# EAGLE board Notification area (EAGLE 7.3.0)
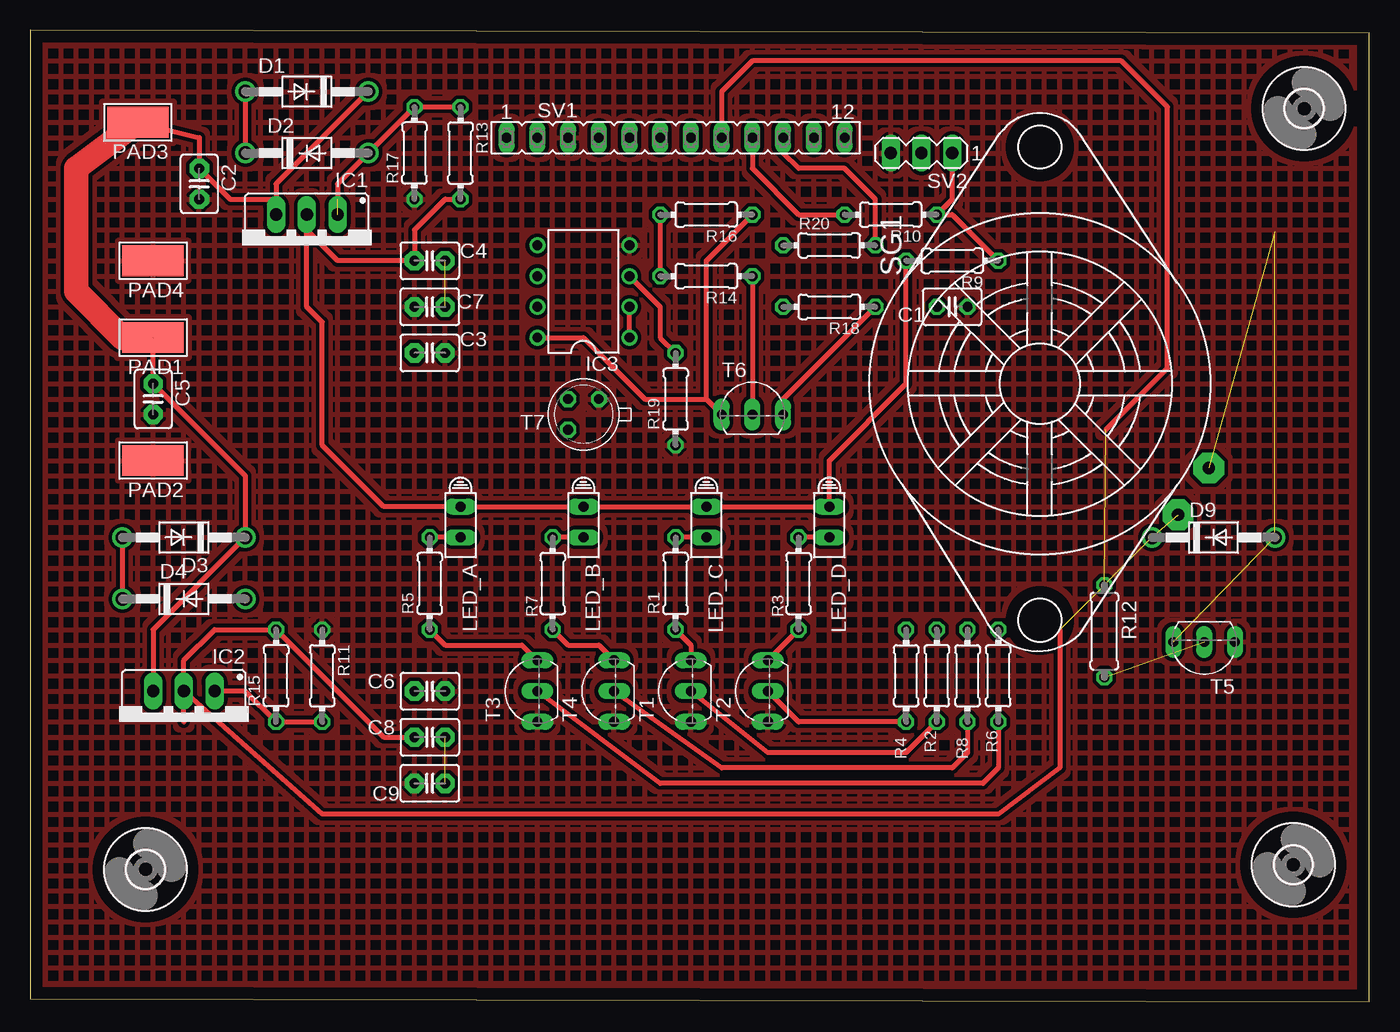
[diagram p0: board, top side]
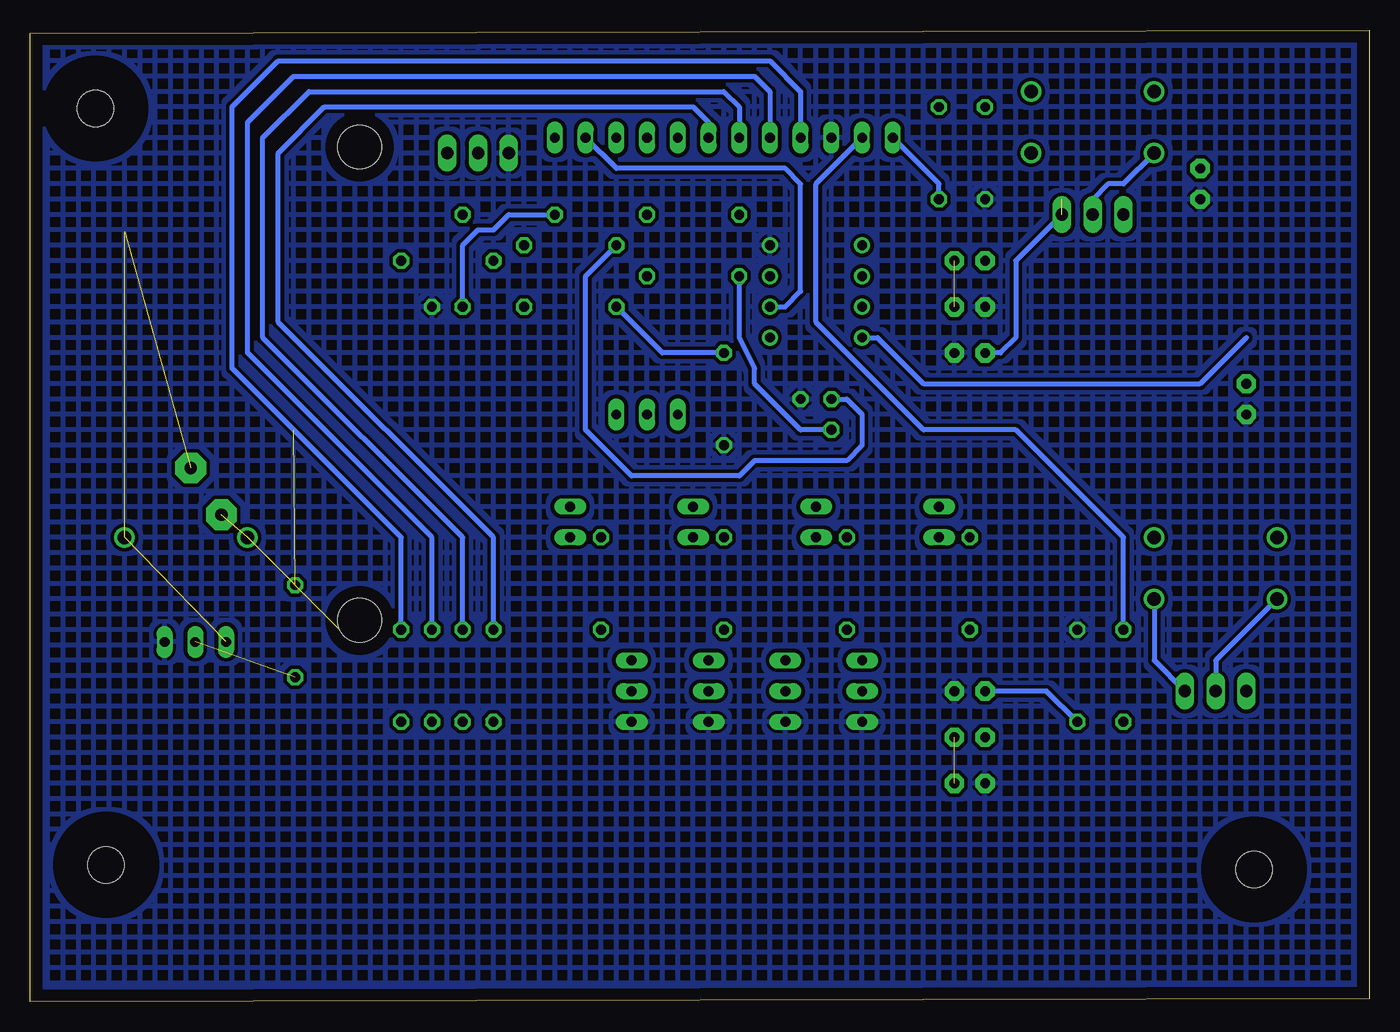
[diagram p1: board, bottom side, seen from below]

Size 110.67 x 80.25 mm. Coordinates in mm from the lower left corner, seen from the top.
Outline: 0,0.25 110.67,0 110.67,80 0,80.25 0,0.25
Copper layers (1*16): Top 0.035mm / dielectric 1.5mm / Bottom 0.035mm
Design rules "default": minimum track width 10mil, minimum drill 24mil, track to track 8mil, track to pad 8mil, pad to pad 8mil, via to via 8mil, smd to smd 8mil, copper to edge 40mil, drill to drill 8mil, minimum pad ring 10mil, minimum via ring 8mil, stop-mask expansion 4mil, vias tented up to drill 0mil, thermal gap 10mil

## Footprints (pad centres in the part's own frame; a part is rotated, then mirrored left to right if it is on the bottom)
C025-030X050 = drill 0.813 octagon: 1 -1.27,0; 2 1.27,0
C2.5-3 = drill 0.813 pad 1.6 octagon: 1 -1.27,0; 2 1.27,0
DO41-10 = drill 1.118: A 5.08,0; C -5.08,0
317TS = drill 1.016 long: 1 -2.54,-2.54; 2 0,-2.54; 3 2.54,-2.54
DIL08 = drill 0.813 pad 1.27: 1 -3.81,-3.81; 2 -1.27,-3.81; 3 1.27,-3.81; 4 3.81,-3.81; 5 3.81,3.81; 6 1.27,3.81; 7 -1.27,3.81; 8 -3.81,3.81
HLMP6 = drill 0.813 long: A -1.27,0; K 1.27,0
5-2,5 = smd 2.54 x 5.08: 1 0,0
0204/7 = drill 0.813 octagon: 1 -3.81,0; 2 3.81,0
0207/7 = drill 0.813 octagon: 1 -3.81,0; 2 3.81,0
F/DB18 = drill 1.016 pad 2.54 octagon: + -6.96,-13.97; - -10.82,-11.43 | hole 3.607: 19.558,0; -19.558,0
FE12 = drill 0.813 long: 1 -13.97,0; 2 -11.43,0; 3 -8.89,0; 4 -6.35,0; 5 -3.81,0; 6 -1.27,0; 7 1.27,0; 8 3.81,0; 9 6.35,0; 10 8.89,0; 11 11.43,0; 12 13.97,0
MA03-1 = drill 1.016 long: 1 -2.54,0; 2 0,0; 3 2.54,0
TO92-EBC = drill 0.813 long: B 0,-1.27; C 2.54,-1.27; E -2.54,-1.27
TO18 = drill 0.813 octagon: 1 -1.27,-1.27; 2 1.27,-1.27; 3 1.27,1.27
3,0 = hole 3: 0,0

## Placement (x,y rotation side)
C1  0.47uF  [C025-030X050]  76.2,57.4 0 top
C2  0.1uF  [C2.5-3]  13.97,67.56 270 top
C3  0.1uF  [C2.5-3]  33.02,53.59 0 top
C4  2uF  [C2.5-3]  33.02,61.21 0 top
C5  0.1uF  [C2.5-3]  10.16,49.78 270 top
C6  0.1uF  [C2.5-3]  33.02,25.65 0 top
C7  2uF  [C2.5-3]  33.02,57.4 180 top
C8  2uF  [C2.5-3]  33.02,21.84 0 top
C9  2uF  [C2.5-3]  33.02,18.03 180 top
D1  1N4001  [DO41-10]  22.86,75.18 180 top
D2  1N4001  [DO41-10]  22.86,70.1 0 top
D3  1N4004  [DO41-10]  12.7,38.35 180 top
D4  1N4004  [DO41-10]  12.7,33.27 0 top
D9  1N4004  [DO41-10]  97.79,38.35 0 top
IC1  [317TS]  22.86,62.48 180 top
IC2  [317TS]  12.7,23.11 180 top
IC3  LM358N  [DIL08]  45.72,58.67 90 top
LED_A  BLUE  [HLMP6]  35.56,39.62 270 top
LED_B  GREEN  [HLMP6]  45.72,39.62 270 top
LED_C  RED  [HLMP6]  55.88,39.62 270 top
LED_D  GREEN  [HLMP6]  66.04,39.62 270 top
PAD1  Motor +  [5-2,5]  10.16,54.86 90 top
PAD2  Motor -  [5-2,5]  10.16,44.7 90 top
PAD3  Power +  [5-2,5]  8.89,72.64 90 top
PAD4  Power -  [5-2,5]  10.16,61.21 90 top
R1  72  [0204/7]  53.34,34.54 90 top
R2  1.2K  [0204/7]  74.93,26.92 90 top
R3  72  [0204/7]  63.5,34.54 270 top
R4  1.2K  [0204/7]  72.39,26.92 270 top
R5  72  [0204/7]  33.02,34.54 90 top
R6  1.2K  [0204/7]  80.01,26.92 90 top
R7  72  [0204/7]  43.18,34.54 270 top
R8  1.2K  [0204/7]  77.47,26.92 270 top
R9  3.7K  [0204/7]  76.2,61.21 180 top
R10  2.3K  [0204/7]  71.12,65.02 180 top
R11  614  [0204/7]  24.13,26.92 270 top
R12  1K  [0207/7]  88.77,30.61 270 top
R13  200  [0204/7]  35.56,70.1 270 top
R14  50K  [0204/7]  55.88,59.94 180 top
R15  200  [0204/7]  20.32,26.92 90 top
R16  220  [0204/7]  55.88,65.02 180 top
R17  290  [0204/7]  31.75,70.1 90 top
R18  4.7K  [0204/7]  66.04,57.4 180 top
R19  2.41K  [0204/7]  53.34,49.78 90 top
R20  2.41K  [0204/7]  66.04,62.48 0 top
SG1  F/DB18  [F/DB18]  83.44,51.05 90 top
SV1  [FE12]  53.34,71.37 0 top
SV2  [MA03-1]  73.66,70.1 180 top
T1  [TO92-EBC]  53.34,25.65 90 top
T2  [TO92-EBC]  59.69,25.65 90 top
T3  [TO92-EBC]  40.64,25.65 90 top
T4  [TO92-EBC]  46.99,25.65 90 top
T5  [TO92-EBC]  97.03,28.45 180 top
T6  [TO92-EBC]  59.69,49.78 0 top
T7  2N2222  [TO18]  45.72,48.51 180 top
U$1  [3,0]  9.53,10.92 0 top
U$2  [3,0]  105.28,73.79 0 top
U$4  [3,0]  104.39,11.3 0 top

## Library data of the parts
C1 R1-R20 = rcl
C2-C9 = capacitor-wima
D1-D4 D9 = diode
IC1 IC2 = v-reg
IC3 = linear
LED_A LED_B LED_C LED_D = display-hp; MF: AGILENT TECHNOLOGIES; MPN: HLMP-6500; OC_FARNELL: 1652490; OC_NEWARK: 40K0088
PAD1-PAD4 = wirepad
SG1 = buzzer; OC_FARNELL: unknown; OC_NEWARK: unknown
SV1 = con-lsta; OC_FARNELL: unknown; OC_NEWARK: unknown
SV2 = con-lstb; OC_FARNELL: unknown; OC_NEWARK: unknown
T1-T7 = transistor-neu-to92
U$1 U$2 U$4 = holes

## Nets
+3V3: C4.1 D1.A D2.C IC1.2 LED_A.A LED_B.A LED_C.A LED_D.A R9.2 R13.2 SV1.1
+5V: C8.1 D3.A D4.C D9.C IC2.2 R15.2 SG1.- SV1.2
GND: C1.2 C2.2 C3.2 C5.2 C6.2 C7.2 C9.2 IC3.4 PAD2.1 PAD4.1 R11.1 R17.1 R19.1 SV1.3 SV2.3 T1.E T2.E T3.E T4.E T5.E T7.1
N$1: LED_C.K R1.2
N$2: R2.1 T1.B
N$3: LED_D.K R3.1
N$4: R4.2 T2.B
N$5: LED_A.K R5.2
N$6: R6.1 T3.B
N$7: LED_B.K R7.1
N$8: R8.2 T4.B
N$9: R6.2 SV1.4
N$10: C1.1 R10.2 SV1.9
N$11: R8.1 SV1.5
N$12: R4.1 SV1.7
N$13: R9.1 R10.1 SV2.1
N$14: R5.1 T3.C
N$16: R12.2 T5.B
N$17: C4.2 C7.1
N$18: R2.2 SV1.6
N$19: C3.1 D2.A IC1.1 R13.1 R17.2
N$20: C6.1 D4.A IC2.1 R11.2 R15.1
N$21: D9.A SG1.+ T5.C
N$22: R14.1 T6.B
N$23: R14.2 R16.2 T7.3
N$24: R12.1 SV1.8
N$25: R18.1 T6.C
N$26: IC3.1 IC3.2 SV1.11
N$27: IC3.3 R18.2 R19.2
N$28: R20.2 SV1.10
N$29: R20.1 T7.2
N$30: C8.2 C9.1
N$31: R7.2 T4.C
N$32: R1.1 T1.C
N$33: R3.2 T2.C
V+: C2.1 C5.1 D1.C D3.C IC1.3 IC2.3 IC3.8 PAD1.1 PAD3.1 R16.1 T6.E

## Tracks (layer width: path | path; a pad name or v marks a point on that pad's centre or on a via)
+3V3
  Top 0.406: D1.A D2.C | R13.2 34.29,66.29 31.75,63.75 C4.1 25.4,61.21 22.86,63.75 | 22.86,63.75 22.86,57.4 24.13,56.13 24.13,45.97 29.21,40.89 LED_A.A LED_B.A LED_C.A LED_D.A 66.04,44.7 72.39,51.05 R9.2 | 22.86,63.75 IC1.2
  Bottom 0.406: D2.C 20.32,67.56 21.59,67.56 22.86,66.29 IC1.2 | R13.2 35.56,67.56 SV1.1
+5V  (2 unrouted)
  Top 0.406: D3.A D4.C | IC2.2 12.7,28.19 15.24,30.73 R15.2 29.21,21.84 C8.1 | 12.7,23.11 IC2.2 | 85.09,30.73 85.09,19.3 80.01,15.49 24.13,15.49 IC2.2
  Bottom 0.406: D4.C 12.7,28.19 IC2.2 | R15.2 20.32,38.35 29.21,47.24 36.83,47.24 45.72,56.13 45.72,67.56 SV1.2
GND
  pour Bottom (isolate 0.305, hatched): 0,80.26 0,0.25 110.93,0.13 110.93,80.14
  pour Top (isolate 0.305, hatched): 0,80.26 0,0.25 110.93,0.64 110.93,80.65
N$1
  Top 0.406: LED_C.K R1.2
N$2
  Top 0.406: R2.1 72.39,20.57 60.96,20.57 T1.B
N$3
  Top 0.406: LED_D.K R3.1
N$4
  Top 0.406: R4.2 63.5,23.11 T2.B
N$5
  Top 0.406: LED_A.K R5.2
N$6
  Top 0.406: R6.1 80.01,19.3 78.74,18.03 52.07,18.03 T3.B
N$7
  Top 0.406: LED_B.K R7.1
N$8
  Top 0.406: R8.2 77.47,20.57 76.2,19.3 57.15,19.3 T4.B
N$9
  Bottom 0.406: R6.2 80.01,38.35 93.98,52.32 93.98,73.91 90.17,77.72 49.53,77.72 46.99,75.18 SV1.4
N$10
  Top 0.406: SV1.9 59.69,68.83 63.5,65.02 R10.2
  Bottom 0.406: C1.1 74.93,62.48 73.66,63.75 72.39,63.75 71.12,65.02 R10.2
N$11
  Bottom 0.406: R8.1 77.47,38.35 92.71,53.59 92.71,72.64 88.9,76.45 50.8,76.45 49.53,75.18 SV1.5
N$12
  Bottom 0.406: R4.1 72.39,38.35 90.17,56.13 90.17,70.1 86.36,73.91 55.88,73.91 54.61,72.64 SV1.7
N$13
  Top 0.406: SV2.1 76.2,66.29 R10.1 76.2,65.02 R9.1
N$14
  Top 0.406: R5.1 34.29,29.46 40.64,29.46 T3.C
N$16  (1 unrouted)
N$17  (1 unrouted)
N$18
  Bottom 0.406: R2.2 74.93,38.35 91.44,54.86 91.44,71.37 87.63,75.18 53.34,75.18 52.07,73.91 SV1.6
N$19  (1 unrouted)
  Top 0.406: 25.4,66.29 25.4,67.56 D2.A R17.2 R13.1
  Bottom 0.406: IC1.1 29.21,61.21 29.21,54.86 30.48,53.59 C3.1
N$20
  Top 0.406: R11.2 R15.1 17.78,25.65 IC2.1
  Bottom 0.406: R11.2 26.67,25.65 C6.1 | D4.A 17.78,28.19 IC2.1
N$21  (3 unrouted)
N$22
  Top 0.406: R14.1 T6.B
N$23
  Top 0.406: R16.2 R14.2
  Bottom 0.406: T7.3 46.99,47.24 50.8,51.05 50.8,52.32 52.07,54.86 R14.2
N$24  (1 unrouted)
  Top 0.406: 88.9,47.24 93.98,52.32 93.98,73.91 90.17,77.72 59.69,77.72 57.15,75.18 SV1.8
N$25
  Top 0.406: T6.C 62.23,49.78 R18.1
N$26
  Top 0.406: IC3.1 IC3.2
  Bottom 0.406: IC3.2 48.26,57.4 46.99,58.67 46.99,67.56 48.26,68.83 62.23,68.83 SV1.11
N$27
  Top 0.406: IC3.3 52.07,57.4 52.07,54.86 R19.2
  Bottom 0.406: R19.2 58.42,53.59 R18.2
N$28
  Top 0.406: R20.2 69.85,66.29 67.31,68.83 63.5,68.83 62.23,70.1 SV1.10
N$29
  Bottom 0.406: T7.2 43.18,49.78 41.91,48.51 41.91,45.97 43.18,44.7 50.8,44.7 52.07,43.43 60.96,43.43 64.77,47.24 64.77,59.94 R20.1
N$30  (1 unrouted)
N$31
  Top 0.406: R7.2 44.45,29.46 46.99,29.46 T4.C
N$32
  Top 0.406: R1.1 54.61,29.46 T1.C
N$33
  Top 0.406: R3.2 T2.C
V+  (1 unrouted)
  Top 0.406: D1.C 20.32,67.56 20.32,66.29 | 20.32,66.29 IC1.3 | PAD3.1 13.97,71.37 C2.1 16.51,66.29 20.32,66.29 | PAD1.1 C5.1 17.78,43.43 D3.C 10.16,30.73 IC2.3 | IC3.8 45.72,54.86 50.8,49.78 55.88,49.78 | 55.88,49.78 T6.E | 55.88,49.78 55.88,61.21 R16.1
  Top 2.032: PAD3.1 3.81,68.83 3.81,58.67 7.62,54.86 PAD1.1 11.43,54.86
  Bottom 0.406: IC3.8 40.64,54.86 36.83,51.05 13.97,51.05 PAD1.1

## Text on the board
200bmp: Jose A. Montes Perez / Enrique J. Torres Rivera / Leroy Y. Gonzalez Torres / ICOM 4217